# EAGLE board wiring_diagram (EAGLE 9.7.0)

Size 163.99 x 53.99 mm. Coordinates in mm from the lower left corner, seen from the top.
Outline: 0,0 163.99,0 163.99,53.99 0,53.99 0,0
Copper layers (1*16): Top 0.035mm / dielectric 1.5mm / Bottom 0.035mm
Design rules "default": minimum track width 6mil, minimum drill 0.35mm, track to track 6mil, track to pad 6mil, pad to pad 6mil, via to via 6mil, smd to smd 6mil, copper to edge 40mil, drill to drill 6mil, minimum pad ring 10mil, minimum via ring 8mil, stop-mask expansion 4mil, vias tented up to drill 0mil, thermal gap 10mil

## Footprints (pad centres in the part's own frame; a part is rotated, then mirrored left to right if it is on the bottom)
BAT_3002 = smd 3.96 x 3.96: N 0,0.65 | smd 5.08 x 5.08: P 12.825,0.65; P1 -12.825,0.65
HC-SR04 = drill 1.016 long: 1 -3.81,0; 2 -1.27,0; 3 1.27,0; 4 3.81,0
PIEZO = drill 1 pad 1.6: 1 -3.5,0; 2 3.5,0
DIP787W55P254L958H533Q8B-8P3 = drill 0.852 pad 1.452: 1 -3.81,3.81; 2 -3.81,1.27; 3 -3.81,-1.27; 4 -3.81,-3.81; 5 3.81,-3.81; 6 3.81,-1.27; 7 3.81,1.27; 8 3.81,3.81

## Placement (x,y rotation side)
BAT1  BR2016  [BAT_3002]  50.67,22.45 0 top
BAT2  BR2016  [BAT_3002]  20.19,22.45 0 top
DIST1  DISTANCE-SENSOR-4PINHC-SR04  [HC-SR04]  137.95,22.23 0 top
PIEZO1  PIEZO  [PIEZO]  98.25,40.41 0 top
U2  ATtiny25-20PU  [DIP787W55P254L958H533Q8B-8P3]  90.61,30.61 90 top

## Library data of the parts
BAT1 BAT2 = Tinkercad; CATEGORY: Battery-Holder; CELL_DIAMETER: 20mm; DESCRIPTION: Battery Retainer Coin, 20.0mm 1 Cell SMD (SMT) Tab; MANUFACTURER: Keystone Electronics; MPN: 3002; PART_STATUS: ACTIVE; ROHS_COMPLIANT: COMPLIANT; SERIES: -; SUB_CATEGORY: Holder; TYPE: Coin Cell
DIST1 PIEZO1 = Tinkercad
U2 = Tinkercad; CATEGORY: IC_Embedded; CORE: AVR; DESCRIPTION: AVR AVR® ATtiny, Functional Safety (FuSa) Microcontroller IC 8-Bit 20MHz 2KB (1K x 16) FLASH 8-PDIP; MANUFACTURER: Microchip Technology; MPN: ATtiny25-20PU; OPERATING_TEMP: -40°C to 85°C; PART_STATUS: Active; ROHS_COMPLIANT: COMPLIANT; SERIES: ATtiny25; SPEED: 20 MHz; SUB-CATEGORY: Microcontroller; TYPE: AVR Microcontroller

## Nets
BAT1+: BAT1.P BAT1.P1 DIST1.1 U2.8
BAT1-: BAT1.N BAT2.P BAT2.P1
BAT2-: BAT2.N DIST1.4 PIEZO1.2 U2.4
U2_PB1: PIEZO1.1 U2.6
U2_PB3: DIST1.2 U2.2
U2_PB4: DIST1.3 U2.3

## Tracks (layer width: path | path; a pad name or v marks a point on that pad's centre or on a via)
BAT1+  (3 unrouted)
BAT1-  (2 unrouted)
BAT2-  (3 unrouted)
U2_PB1  (1 unrouted)
U2_PB3  (1 unrouted)
U2_PB4  (1 unrouted)